# EAGLE board Smart Home automation (EAGLE 9.7.0)

Size 222.93 x 162.04 mm. Coordinates in mm from the lower left corner, seen from the top.
Outline: 0,0 222.93,0 222.93,162.04 0,162.04 0,0
Copper layers (1*16): Top 0.035mm / dielectric 1.5mm / Bottom 0.035mm
Design rules "default": minimum track width 6mil, minimum drill 0.35mm, track to track 6mil, track to pad 6mil, pad to pad 6mil, via to via 6mil, smd to smd 6mil, copper to edge 40mil, drill to drill 6mil, minimum pad ring 10mil, minimum via ring 8mil, stop-mask expansion 4mil, vias tented up to drill 0mil, thermal gap 10mil

## Footprints (pad centres in the part's own frame; a part is rotated, then mirrored left to right if it is on the bottom)
LEDRD254W60D565H860B = drill 0.981 pad 1.581: 1 -1.27,0; 2 1.27,0
LEDRD254W60D565H860B_B = drill 0.981 pad 1.581: 1 -1.27,0; 2 1.27,0
MQ-XX-SOCKET = drill 1.27: 1 -6.223,6.223; 2 -8.788,0; 3 -6.223,-6.223; 4 6.223,-6.223; 5 8.788,0; 6 6.223,6.223
1X02 = drill 1.016 long: 1 -1.27,0; 2 1.27,0
MOTOR = drill 1.118 pad 3.15 octagon: + 2.54,0; - -2.54,0
PIEZO = drill 1 pad 1.6: 1 -3.5,0; 2 3.5,0
28015 = drill 1.016 long: 1 -2.54,0; 2 0,0; 3 2.54,0
28027 = drill 1.016 long: 1 -2.54,0; 2 0,0; 3 2.54,0
GL5528 = drill 0.8 pad 1.4: 1 -1.702,0; 2 1.702,0
RESAD1016W63L850D250B = drill 0.83 pad 1.43: 1 -5.08,0; 2 5.08,0
SWITCH-MOMENTARY-PTH-6.5MM = drill 1.016 pad 1.88: 1 -3.251,2.261; 2 3.251,2.261; 3 -3.251,-2.261; 4 3.251,-2.261
ARDUINO-UNO-R3-SHIELD = drill 1.016 pad 1.88: 3.3V 24.13,-2.54; 5V 24.13,0; A0 24.13,12.7; A1 24.13,15.24; A2 24.13,17.78; A3 24.13,20.32; A4 24.13,22.86; A5 24.13,25.4; AREF -24.13,-13.97; D2 -24.13,20.32; D3 -24.13,17.78; D4 -24.13,15.24; D5 -24.13,12.7; D6 -24.13,10.16; D7 -24.13,7.62; D8 -24.13,3.81; D9 -24.13,1.27; D10 -24.13,-1.27; D11 -24.13,-3.81; D12 -24.13,-6.35; D13 -24.13,-8.89; GND@0 24.13,2.54; GND@1 24.13,5.08; GND@2 -24.13,-11.43; IOREF 24.13,-7.62; NC 24.13,-10.16; RES 24.13,-5.08; RX -24.13,25.4; SCL -24.13,-19.05; SDA -24.13,-16.51; TX -24.13,22.86; VIN 24.13,7.62

## Placement (x,y rotation side)
D1  RED  [LEDRD254W60D565H860B]  100.21,74.73 180 top
D2  BLUE  [LEDRD254W60D565H860B_B]  122.51,31.17 180 top
GAS1  GAS-SENSORMQ-XX-SOCKET  [MQ-XX-SOCKET]  155.83,27.24 300 top
L1  LIGHTBULB  [1X02]  39.73,155.77 0 top
M1  MOTOR_HDR  [MOTOR]  108.47,8.26 180 top
PIEZO1  PIEZO  [PIEZO]  200.72,118.09 270 top
PINGULTRASONIC  DISTANCE-SENSOR-3PIN  [28015]  144.46,113.53 0 top
PIR1  PIR-SENSOR_28027  [28027]  216.58,82.68 270 top
R1  PHOTOCELL_GL5528  [GL5528]  140.85,74.73 0 top
R2  10k  [RESAD1016W63L850D250B]  139.58,89.97 90 top
R3  4.7k  [RESAD1016W63L850D250B]  142.12,54.41 90 top
R4  1k  [RESAD1016W63L850D250B]  119.26,62.03 0 top
S1  SWITCH_MOMENTARY  [SWITCH-MOMENTARY-PTH-6.5MM]  111.64,70.92 90 top
U1  ARDUINO-UNO-R3-SHIELD  [ARDUINO-UNO-R3-SHIELD]  47.88,75.73 270 top

## Library data of the parts
D1 = Tinkercad; CATEGORY: Opto-Electronic; SUB-CATEGORY: LED; VALUE: LED_RED
D2 = Tinkercad; CATEGORY: Opto-Electronic; SUB-CATEGORY: LED; VALUE: LED_BLUE
GAS1 L1 M1 PIEZO1 PINGULTRASONIC PIR1 R1-R4 S1 U1 = Tinkercad

## Nets
U1_5V: GAS1.1 GAS1.2 GAS1.3 PINGULTRASONIC.2 PIR1.2 R1.2 S1.1 S1.2 U1.5V
U1_A0: R1.1 R2.1 U1.A0
U1_A5: GAS1.4 GAS1.6 R3.2 U1.A5
U1_D2: D1.1 U1.D2
U1_D3: PIEZO1.1 U1.D3
U1_D4: PIR1.1 U1.D4
U1_D5: R4.1 S1.3 S1.4 U1.D5
U1_D7: L1.1 U1.D7
U1_D8: D2.1 U1.D8
U1_D10: PINGULTRASONIC.3 U1.D10
U1_D13: M1.- U1.D13
U1_GND: D1.2 D2.2 GAS1.5 L1.2 M1.+ PIEZO1.2 PINGULTRASONIC.1 PIR1.3 R2.2 R3.1 R4.2 U1.GND@0 U1.GND@1 U1.GND@2

## Tracks (layer width: path | path; a pad name or v marks a point on that pad's centre or on a via)
U1_5V  (8 unrouted)
U1_A0  (2 unrouted)
U1_A5  (3 unrouted)
U1_D2  (1 unrouted)
U1_D3  (1 unrouted)
U1_D4  (1 unrouted)
U1_D5  (3 unrouted)
U1_D7  (1 unrouted)
U1_D8  (1 unrouted)
U1_D10  (1 unrouted)
U1_D13  (1 unrouted)
U1_GND  (13 unrouted)